# EAGLE board KN-CON (EAGLE 6.0)
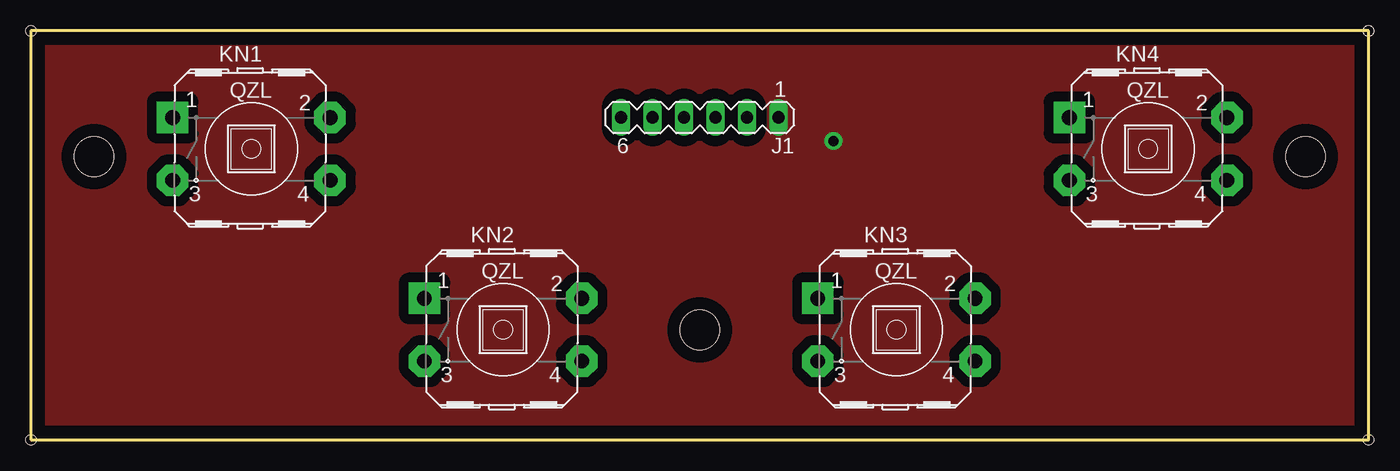
[diagram p0: board, top side]
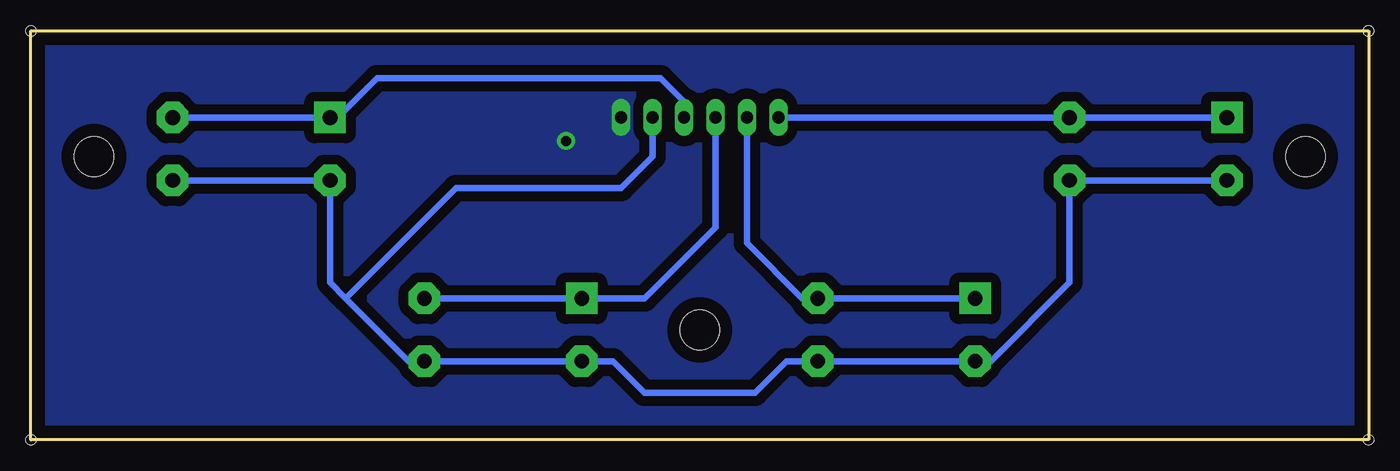
[diagram p1: board, bottom side, seen from below]

Size 107.95 x 33.02 mm. Coordinates in mm from the lower left corner, seen from the top.
Outline: 0,0 107.95,0 107.95,33.02 0,33.02 0,0
Copper layers (1*16): Top 0.035mm / dielectric 1.5mm / Bottom 0.035mm
Design rules: minimum track width 10mil, minimum drill 24mil, track to track 8mil, track to pad 8mil, pad to pad 8mil, via to via 8mil, smd to smd 8mil, copper to edge 40mil, drill to drill 8mil, minimum pad ring 10mil, minimum via ring 8mil, stop-mask expansion 4mil, vias tented up to drill 0mil, thermal gap 10mil
Holes 3.2 mm at 5.08,22.86 102.87,22.86 53.98,8.89
Holes 0.8 mm at 0,33.02 0,0 107.95,0 107.95,33.02

## Footprints (pad centres in the part's own frame; a part is rotated, then mirrored left to right if it is on the bottom)
MA06-1 = drill 1 long: 1 -6.35,0; 2 -3.81,0; 3 -1.27,0; 4 1.27,0; 5 3.81,0; 6 6.35,0
LZQ-KN = drill 1.2 pad 2.54 square: 1 -6.35,2.54 | drill 1.2 pad 2.54 octagon: 2 6.35,2.54; 3 -6.35,-2.54; 4 6.35,-2.54

## Placement (x,y rotation side)
J1  [MA06-1]  53.98,26.04 180 top
KN1  LZQ-KN  [LZQ-KN]  17.78,23.5 0 top
KN2  LZQ-KN  [LZQ-KN]  38.1,8.89 0 top
KN3  LZQ-KN  [LZQ-KN]  69.85,8.89 0 top
KN4  LZQ-KN  [LZQ-KN]  90.17,23.5 0 top

## Library data of the parts
J1 = con-lstb
KN1-KN4 = Dmitry

## Nets
+5V: J1.2 KN1.3 KN1.4 KN2.3 KN2.4 KN3.3 KN3.4 KN4.3 KN4.4
GND: J1.1
N$1: J1.6 KN1.1 KN1.2
N$2: J1.5 KN2.1 KN2.2
N$5: J1.4 KN3.1 KN3.2
N$6: J1.3 KN4.1 KN4.2

## Tracks (layer width: path | path; a pad name or v marks a point on that pad's centre or on a via)
+5V
  Bottom 0.508: KN1.3 KN1.4 24.13,12.7 30.48,6.35 KN2.3 KN2.4 46.99,6.35 49.53,3.81 58.42,3.81 60.96,6.35 KN3.3 KN3.4 77.47,6.35 82.55,11.43 | 82.55,11.43 83.82,12.7 KN4.3 KN4.4 | J1.2 57.78,22.86 60.33,20.32 73.66,20.32 82.55,11.43
GND  (via drill 0.8 pad 1.42)
  other vias: 64.77,24.13
  pour Top (isolate 0.813, no thermals): 0,33.02 0,0 107.95,0 107.95,33.02
  pour Bottom (isolate 0.813, no thermals): 0,33.02 107.95,33.02 107.95,0 0,0
N$1
  Bottom 0.508: J1.6 KN1.2 KN1.1
N$2
  Bottom 0.508: J1.5 50.16,15.88 45.72,11.43 KN2.2 KN2.1
N$5
  Bottom 0.508: J1.4 52.7,17.14 58.42,11.43 KN3.1 KN3.2
N$6
  Bottom 0.508: J1.3 55.24,27.3 57.15,29.21 80.01,29.21 83.19,26.04 KN4.1 KN4.2

## Text on the board
Drill_legend: Drill legend | Date: 05.05.2012 14:55:05 | 3.2000 mm / 125.984 mil | 1.2000 mm / 47.244 mil | 1.0000 mm / 39.370 mil | 0.8000 mm / 31.496 mil